# Altium PCB BreakBoard_bigger.PcbDoc
Units mm, origin at the board's own origin, x right, y up, seen from the top; angles counter-clockwise.
Board outline 137.03 x 112.9 mm, 2 copper layers (Top Layer, Bottom Layer), stack 1.331 mm thick; 41 components, 30 nets, 132 pads, 35 vias.
Unrouted connection lines stored in the file: 1.
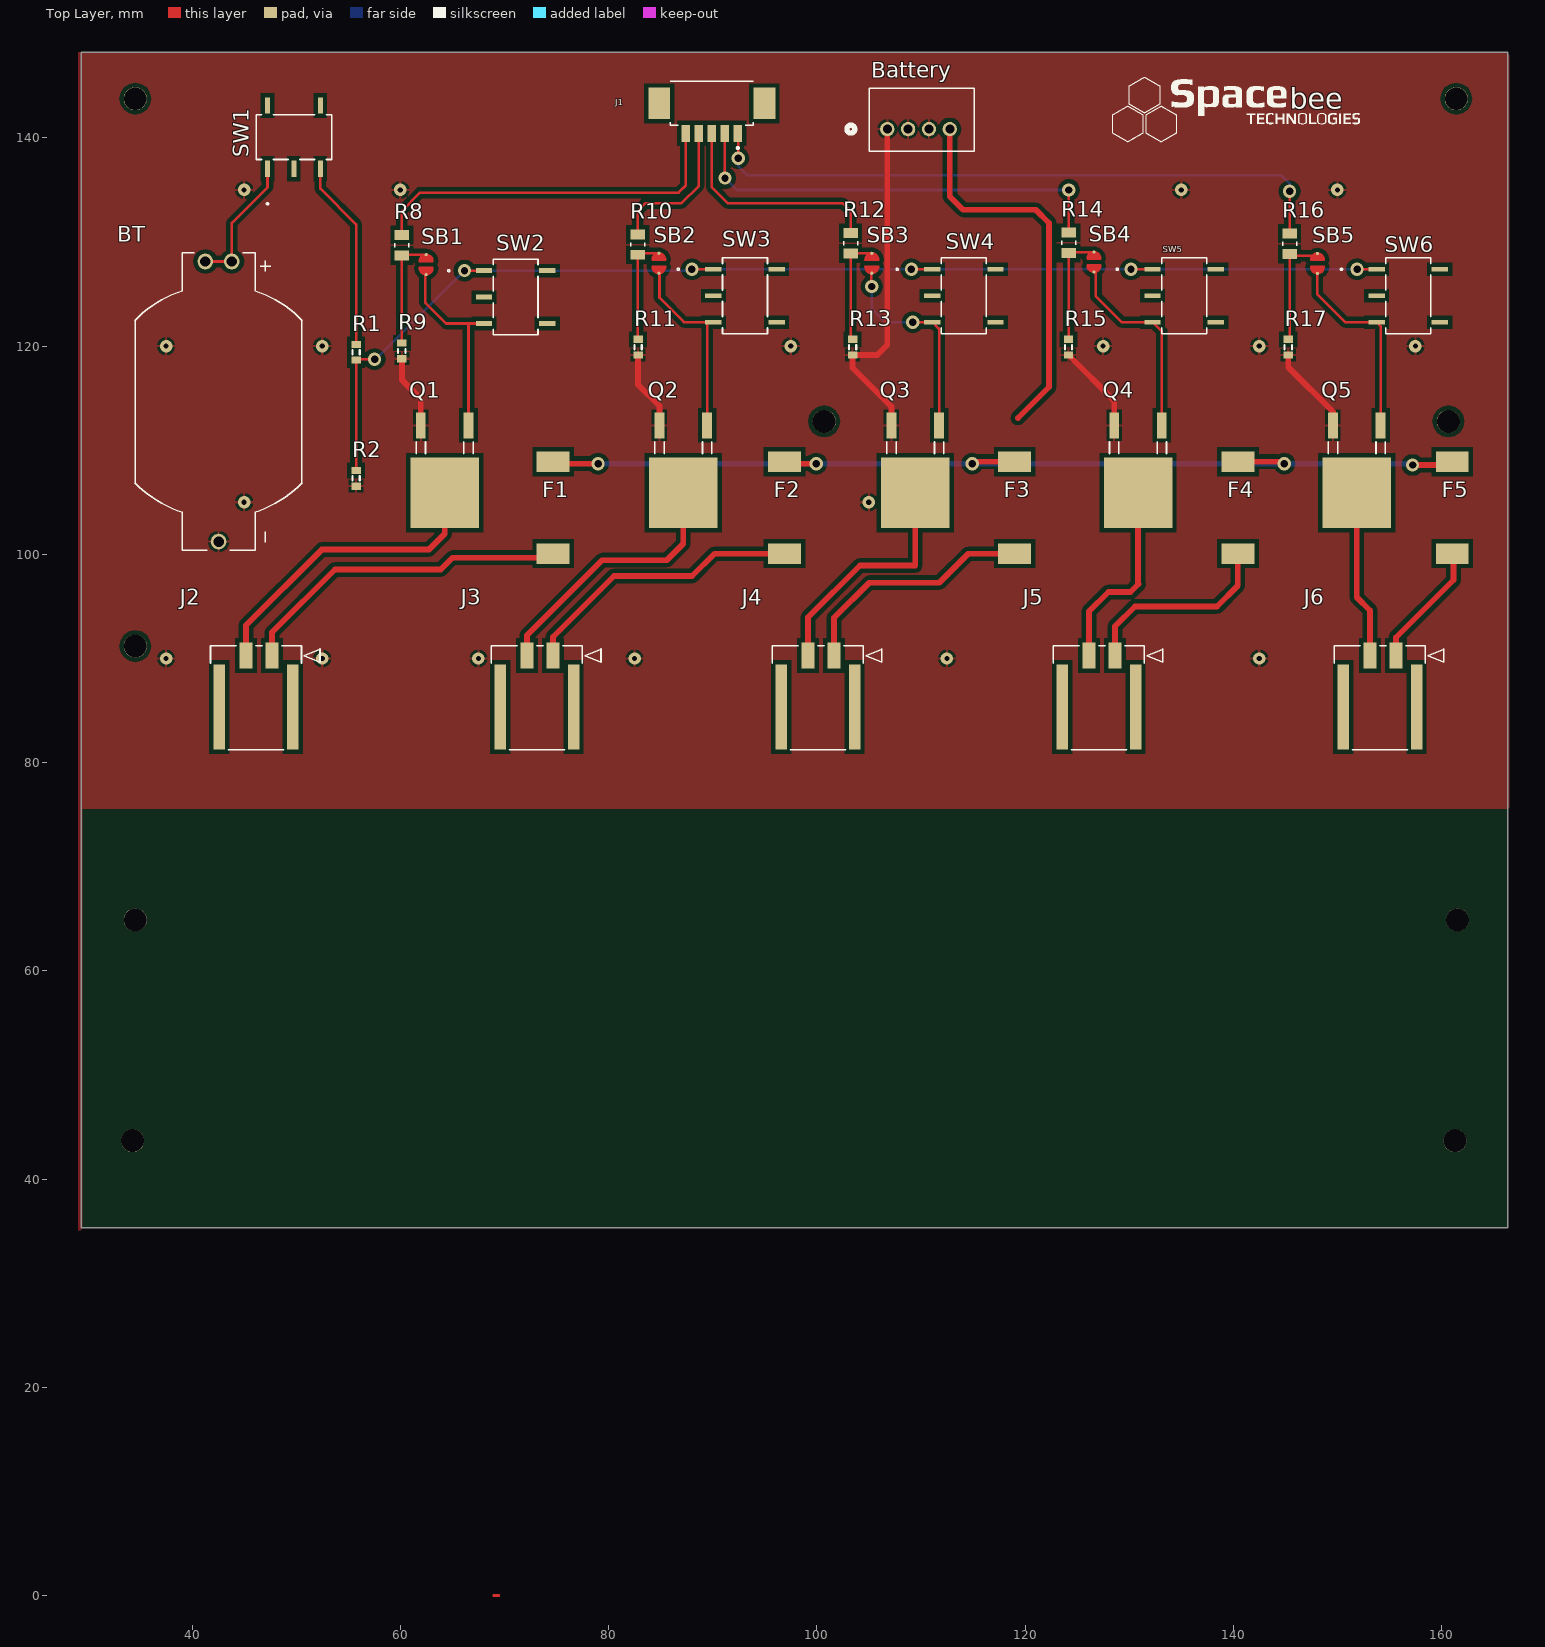
[diagram p0: Top Layer view]
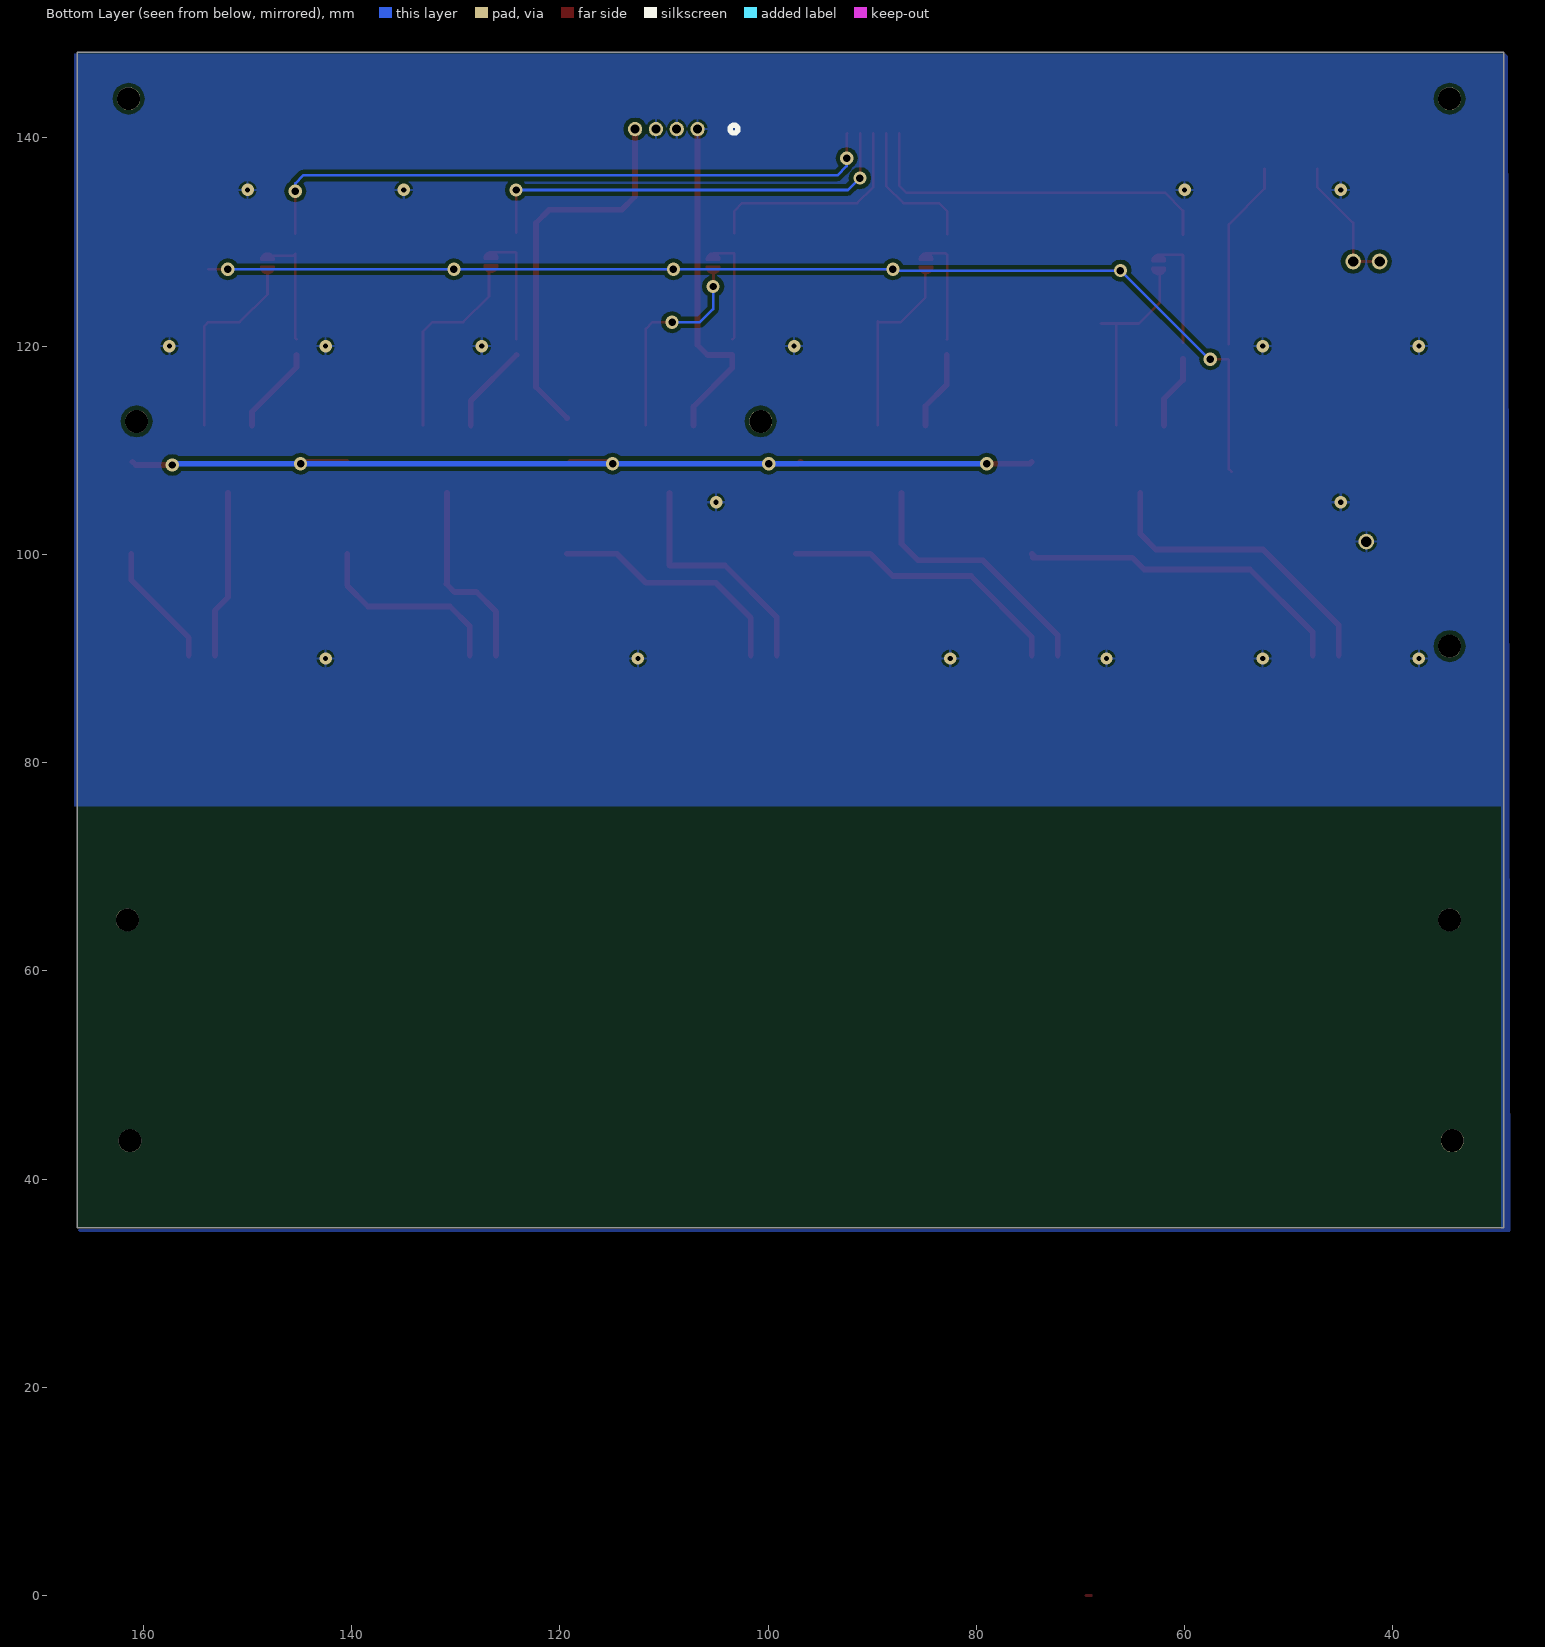
[diagram p1: Bottom Layer view, seen from below]

## Layer stack, top to bottom
Top Solder: solder mask 0.0102, Solder Resist, Dk 3.5
Top Layer: signal copper 0.0356
Dielectric 1: dielectric 1.26, FR-4, Dk 4.8
Bottom Layer: signal copper 0.0356
Bottom Solder: solder mask 0.0102, Solder Resist, Dk 3.5

## Board outline
29.337,35.306 166.37,35.306 166.37,148.209 29.337,148.209

## Design rules (kind name [scope] priority, off if disabled: settings)
Clearance Clearance_1 [All] p1: gap=0.4 ignorepadtopadclearanceinfootprint=FALSE
Clearance "Schematic Clearance Constraint" [InNetClass('Undefined')] p2: gap=0.015 ignorepadtopadclearanceinfootprint=FALSE
Clearance Vias [OnLayer('Top Layer')] p3: gap=0.8 ignorepadtopadclearanceinfootprint=FALSE
PolygonConnect [All] p1: connectstyle=Relief reliefconductorwidth=0.254 reliefentries=4 polygonreliefangle="90 Angle" airgapwidth=0.254
RoutingVias [All] p1: holewidth=0.711 width=1.27 viastyle="Through Hole" minholewidth=0.711 minwidth=1.27 maxholewidth=0.711 maxwidth=1.27
SolderMaskExpansion [All] p1: expansion=0.102
Width "Schematic Width Constraint_10" [InNetClass('Undefined')] p1: maxlimit=0.559 minlimit=0.559 preferedwidth=0.559 minimp=50.000000 maximp=50.000000 favimp=50.000000
Width "Schematic Width Constraint" [InNetClass('Ids')] p2: maxlimit=0.559 minlimit=0.559 preferedwidth=0.559 minimp=50.000000 maximp=50.000000 favimp=50.000000
Width [All] p3: maxlimit=0.254 minlimit=0.254 preferedwidth=0.254
30 further rules are at their usual default settings.

## Classes and differential pairs
net class Ids: NetBattery_4
net class Undefined: GND NetF1_1 NetF2_1 NetF3_1 NetF4_1 NetF5_1 NetJ2_2 NetJ3_2 NetJ4_2 NetJ5_2 NetJ6_2

## Components (designator, comment, footprint, x,y, rotation, side; value= is the part's Value field where it differs from the comment)
Battery "Header 4" 292132-4_TYC 106.776,140.843 r0 top
BT "BU2032-1" BAT_BU2032-1 42.545,114.681 r270 top
F1 "015403.5DRT" FUSE_Bourns 76.226,99.076 r90 top
F2 "015403.5DRT" FUSE_Bourns 98.451,99.076 r90 top
F3 "015403.5DRT" FUSE_Bourns 120.549,99.076 r90 top
F4 "015403.5DRT" FUSE_Bourns 142.012,99.076 r90 top
F5 "015403.5DRT" FUSE_Bourns 162.586,99.076 r90 top
J1 "Micro" MOLEX_532610571 89.916,141.224 r180 top
J2 "DC/DC" CON_1054302102_MOL 47.687,90.274 r0 top
J3 "DC/DC" CON_1054302102_MOL 74.675,90.274 r0 top
J4 "DC/DC" CON_1054302102_MOL 101.662,90.274 r0 top
J5 "DC/DC" CON_1054302102_MOL 128.65,90.274 r0 top
J6 "DC/DC" CON_1054302102_MOL 155.637,90.274 r0 top
Q1 "IRL530" IRL530NSTRLPBF_INF 64.262,105.918 r180 top
Q2 "IRL530" IRL530NSTRLPBF_INF 87.178,105.918 r180 top
Q3 "IRL530" IRL530NSTRLPBF_INF 109.46,105.918 r180 top
Q4 "IRL530" IRL530NSTRLPBF_INF 130.852,105.918 r180 top
Q5 "IRL530" IRL530NSTRLPBF_INF 151.864,105.918 r180 top
R1 "Res3" J1-0603 55.753,119.416 r90 top value=1M
R2 "Res3" J1-0603 55.753,107.303 r90 top value=3.3M
R8 "Res3" RESC2012X60N 60.149,129.693 r90 top value=2.8M
R9 "Res3" J1-0603 60.149,119.545 r90 top value=3.3M
R10 "Res3" RESC2012X60N 82.804,129.756 r90 top value=2.8M
R11 "Res3" J1-0603 82.836,119.9 r90 top value=3.3M
R12 "Res3" RESC2012X60N 103.251,129.883 r90 top value=2.8M
R13 "Res3" J1-0603 103.441,119.9 r90 top value=3.3M
R14 "Res3" RESC2012X60N 124.206,129.921 r90 top value=2.8M
R15 "Res3" J1-0603 124.174,119.9 r90 top value=3.3M
R16 "Res3" RESC2012X60N 145.415,129.832 r90 top value=2.8M
R17 "Res3" J1-0603 145.288,119.9 r90 top value=3.3M
SB1 "SolderBridge" PCBComponent_1#1 58.364,136.403 r270 top
SB2 "SolderBridge" PCBComponent_1#2 80.716,136.53 r270 top
SB3 "SolderBridge" PCBComponent_1#3 101.163,136.53 r270 top
SB4 "SolderBridge" PCBComponent_1#4 122.499,136.642 r270 top
SB5 "SolderBridge" PCBComponent_1#5 143.962,136.515 r270 top
SW1 "GT12MSCBE" SW5_GT12MSCBE_CNK 49.784,140.081 r90 top
SW2 "GT12MSCBE" SW5_GT12MSCBE_CNK 71.069,124.714 r0 top
SW3 "GT12MSCBE" SW5_GT12MSCBE_CNK 93.107,124.841 r0 top
SW4 "GT12MSCBE" SW5_GT12MSCBE_CNK 114.128,124.841 r0 top
SW5 "GT12MSCBE" SW5_GT12MSCBE_CNK 135.277,124.841 r0 top
SW6 "GT12MSCBE" SW5_GT12MSCBE_CNK 156.807,124.841 r0 top

## Footprints (in the part's own frame and the unit in brackets; to place one, negate y for a bottom-side part, rotate by r counter-clockwise, add the part's x,y. Pads: shape width x height; smd on the part's side, far side on the other; paste and mask are expansions set on the pad)
292132-4_TYC [mil]
  round 54 hole 34 mask+0: 1(0,0) 2(78.74,0) 3(157.48,0) 4(236.22,0)
  silkscreen extent -153,-83 328,155, body extent -65,-85 321,143, height 268
BAT_BU2032-1 [mm]
  round 1.508 hole 1: NEG(13.45,0) S1+(-13.45,1.27) S2+(-13.45,-1.27)
  silkscreen extent -14.3,-8.06 14.3,8.06, body extent -14.43,-10 14.17,10, height 5.3
CON_1054302102_MOL [mm]
  rect 1.24x2.5 smd paste+0 mask+0.076: 1(0,0) 2(-2.5,0)
  rect 1.1x8.2 smd paste+0 mask+0.076: 3(1.97,-4.93) 4(-5.07,-4.93)
  silkscreen extent -5.92,-9.03 4.6,0.95, body extent -5.89,-10.12 2.85,1.31, height 6.99
FUSE_Bourns [mm]
  rect 1.96x3.15 smd: 1(1,1.55) 2(9.825,1.55)
  body extent 0.81,0.43 9.99,2.83, height 2.5
IRL530NSTRLPBF_INF [mil]
  rect 37x98 smd paste+0 mask+0: 1(-90.16,-254.84) 3(90.16,-254.84)
  rect 259x268 smd paste+0 mask+0: 2(0,0)
  silkscreen extent -108,-192 108,-147, body extent -129,-196 129,120, height 94
J1-0603 [mm] "Chip Resistor, Body 1.6x0.8mm, IPC High Density"
  rect 0.7x0.9 smd: 1(-0.75,0) 2(0.75,0)
  silkscreen extent -0.2,-0.35 0.2,0.35, body extent -0.85,-0.48 0.85,0.48, height 0.9
MOLEX_532610571 [mm]
  rect 0.8x1.6 smd: 1(-2.5,0.8) 2(-1.25,0.8) 3(0,0.8) 4(1.25,0.8) 5(2.5,0.8)
  rect 2.1x3 smd: S1(-5.05,-2.1) S2(5.05,-2.1)
  silkscreen extent -4,-4.2 4,2.3, body extent -5.69,-4.25 5.72,0.95, height 3.4
PCBComponent_1#1 [mm]
  round 0.3 smd: 0(9.53,4.12) 1(7.61,4.12)
  Top Layer lines w0.254: 8.96,4.39 9.23,4.39 ; 8.9,3.52 ccw(c8.9,4.12) 9.491,4.015 ; 8.9,3.52 ccw(c8.9,4.12) 9.491,4.015 ; 8.9,3.52 8.9,3.52 ; 8.9,3.52 8.9,3.52 ; 8.9,3.52 8.9,3.52 ; 8.9,3.52 8.9,3.52 ; 8.9,3.52 8.9,3.52 ; 8.9,3.52 8.9,3.52 ; 8.9,3.52 8.9,3.52 ; 8.9,3.52 8.9,3.52 ; 8.9,3.52 8.9,3.52 ; 8.9,3.52 8.9,3.52 ; 8.9,3.52 8.9,3.52 ; 8.9,3.52 8.9,3.52 ; 8.9,3.52 8.9,3.52 ; 8.9,3.52 8.9,3.52 ; 8.9,3.52 8.9,3.52 ; 8.9,3.52 8.9,3.52 ; 8.9,3.52 8.9,3.52 ; 8.9,3.52 8.9,3.52 ; 8.9,3.52 8.9,3.52 ; 8.9,3.52 8.9,3.52 ; 8.9,3.52 8.9,3.52 ; 8.9,3.52 8.9,3.52 ; 8.9,3.52 8.9,3.52 ; 8.9,3.52 8.9,3.52 ; 8.9,3.52 8.9,3.52 ; 8.9,3.52 8.9,3.52 ; 8.9,3.52 8.9,3.52 ; 8.9,3.52 8.9,3.52 ; 8.9,3.52 8.9,3.52 ; 8.9,3.52 8.9,3.52 ; 8.9,3.52 8.9,3.52 ; 8.9,3.52 8.9,3.52 ; 8.9,3.52 8.9,3.52 ; 8.9,3.52 8.9,3.52 ; 8.9,3.52 8.9,3.52 ; 8.9,3.52 8.9,3.52 ; 8.9,3.52 8.9,3.52 ; 8.9,3.52 8.9,3.52 ; 8.9,3.52 8.9,3.52 ; 8.9,3.52 8.9,3.52 ; 8.9,3.52 8.9,3.52 ; 8.9,3.52 8.9,3.52 ; 8.9,3.52 8.9,3.52 ; 8.9,3.52 8.9,3.89 ; 8.9,3.52 8.9,3.52 ; 8.9,3.52 8.9,3.89 ; 8.9,3.52 8.9,3.52 ; 8.9,3.52 8.9,3.52 ; 8.9,3.52 8.9,3.52 ; 8.9,3.52 8.9,3.52 ; 8.9,3.52 8.9,3.52 ; 8.9,3.52 8.9,3.52 ; 8.9,3.52 8.9,3.52 ; 8.9,3.52 8.9,3.52 ; 8.23,3.52 cw(c8.23,4.12) 7.679,3.883 ; 8.23,3.52 cw(c8.23,4.12) 7.679,3.883 ; 8.23,3.52 8.23,3.993 8.23,4.72 ; 7.679,3.883 cw(c8.23,4.12) 7.644,3.993 ; 7.679,3.883 cw(c8.23,4.12) 7.644,3.993 ; 8.9,3.89 8.9,3.91 ; 8.9,3.89 8.9,3.91 ; 8.9,3.89 8.995,3.795 9.1,3.69 9.215,3.805 9.32,3.91 ; 9.32,3.91 9.32,4.015 9.32,4.12 ; 9.32,3.91 9.267,3.963 9.215,4.015 9.11,4.12 9.035,4.195 ; 9.32,3.91 9.11,3.91 8.92,3.91 9.015,4.005 9.02,4.01 9.02,4.12 9.02,4.18 9.035,4.195 ; 8.9,3.91 8.9,4.12 ; 8.9,3.91 8.9,4.12 ; 7.83,3.993 7.83,3.92 7.908,3.842 8.06,3.69 8.06,3.993 8.06,4.55 8.06,4.59 7.83,4.36 ; 7.83,3.993 7.83,4.12 ; 7.83,3.993 7.83,4.12 ; 7.644,3.993 cw(c8.23,4.12) 7.63,4.122 ; 7.644,3.993 cw(c8.23,4.12) 7.63,4.122 ; 9.491,4.015 ccw(c8.9,4.12) 9.5,4.12 ; 9.491,4.015 ccw(c8.9,4.12) 9.5,4.12 ; 9.5,4.12 ccw(c8.9,4.12) 9.479,4.279 ; 9.5,4.12 ccw(c8.9,4.12) 9.479,4.279 ; 9.32,4.12 9.32,4.12 ; 9.32,4.12 9.32,4.12 ; 9.32,4.12 9.32,4.32 ; 9.32,4.12 9.32,4.32 ; 8.9,4.12 8.9,4.33 ; 8.9,4.12 8.9,4.33 ; 7.83,4.12 7.83,4.321 ; 7.83,4.12 7.83,4.321 ; 7.63,4.122 cw(c8.23,4.12) 8.23,4.72 ; 7.63,4.122 cw(c8.23,4.12) 8.23,4.72 ; 9.035,4.195 9.23,4.39 ; 9.035,4.195 9.035,4.195 ; 9.035,4.195 8.9,4.33 ; 9.479,4.279 ccw(c8.9,4.12) 9.416,4.426 ; 9.479,4.279 ccw(c8.9,4.12) 9.416,4.426 ; 9.32,4.32 9.23,4.23 9.23,4.24 9.23,4.39 ; 7.83,4.321 7.83,4.36 ; 7.83,4.321 7.83,4.36 ; 8.9,4.33 8.9,4.72 ; 8.9,4.33 8.9,4.72 ; 8.9,4.33 8.9,4.72 ; 8.9,4.33 8.9,4.72 ; 8.9,4.33 8.9,4.72 ; 8.9,4.33 8.9,4.72 ; 9.23,4.39 8.9,4.72 ; 9.23,4.39 8.9,4.72 ; 9.416,4.426 ccw(c8.9,4.12) 8.9,4.72 ; 9.416,4.426 ccw(c8.9,4.12) 8.9,4.72 ; 8.9,4.72 8.9,4.72 ; 8.9,4.72 8.9,4.72 ; 8.9,4.72 8.9,4.72 ; 8.9,4.72 8.9,4.72 ; 8.9,4.72 8.9,4.72 ; 8.9,4.72 8.9,4.72 ; 8.9,4.72 8.9,4.72 ; 8.9,4.72 8.9,4.72
PCBComponent_1#2 [mm]
  round 0.3 smd: 0(9.53,4.12) 1(7.61,4.12)
  Top Layer lines w0.254: 8.96,4.39 9.02,4.39 9.035,4.39 9.23,4.39 ; 8.9,3.52 ccw(c8.9,4.12) 9.329,3.701 ; 8.9,3.52 ccw(c8.9,4.12) 9.329,3.701 ; 8.9,3.52 8.9,3.52 ; 8.9,3.52 8.9,3.52 ; 8.9,3.52 8.9,3.52 ; 8.9,3.52 8.9,3.52 ; 8.9,3.52 8.9,3.52 ; 8.9,3.52 8.9,3.52 ; 8.9,3.52 8.9,3.52 ; 8.9,3.52 8.9,3.52 ; 8.9,3.52 8.9,3.52 ; 8.9,3.52 8.9,3.52 ; 8.9,3.52 8.9,3.52 ; 8.9,3.52 8.9,3.52 ; 8.9,3.52 8.9,3.52 ; 8.9,3.52 8.9,3.52 ; 8.9,3.52 8.9,3.52 ; 8.9,3.52 8.9,3.52 ; 8.9,3.52 8.9,3.52 ; 8.9,3.52 8.9,3.52 ; 8.9,3.52 8.9,3.52 ; 8.9,3.52 8.9,3.52 ; 8.9,3.52 8.9,3.52 ; 8.9,3.52 8.9,3.52 ; 8.9,3.52 8.9,3.52 ; 8.9,3.52 8.9,3.52 ; 8.9,3.52 8.9,3.52 ; 8.9,3.52 8.9,3.52 ; 8.9,3.52 8.9,3.52 ; 8.9,3.52 8.9,3.52 ; 8.9,3.52 8.9,3.52 ; 8.9,3.52 8.9,3.52 ; 8.9,3.52 8.9,3.52 ; 8.9,3.52 8.9,3.52 ; 8.9,3.52 8.9,3.52 ; 8.9,3.52 8.9,3.52 ; 8.9,3.52 8.9,3.52 ; 8.9,3.52 8.9,3.52 ; 8.9,3.52 8.9,3.52 ; 8.9,3.52 8.9,3.52 ; 8.9,3.52 8.9,3.52 ; 8.9,3.52 8.9,3.52 ; 8.9,3.52 8.9,3.52 ; 8.9,3.52 8.9,3.89 ; 8.9,3.52 8.9,3.52 ; 8.9,3.52 8.9,3.89 ; 8.9,3.52 8.9,3.52 ; 8.9,3.52 8.9,3.52 ; 8.9,3.52 8.9,3.52 ; 8.9,3.52 8.9,3.52 ; 8.9,3.52 8.9,3.52 ; 8.9,3.52 8.9,3.52 ; 8.9,3.52 8.9,3.52 ; 8.9,3.52 8.9,3.52 ; 8.9,3.52 8.9,3.52 ; 8.9,3.52 8.9,3.52 ; 8.23,3.52 cw(c8.23,4.12) 8.026,3.556 ; 8.23,3.52 cw(c8.23,4.12) 8.026,3.556 ; 8.23,3.52 8.23,4.72 ; 8.026,3.556 cw(c8.23,4.12) 7.83,3.673 ; 8.026,3.556 cw(c8.23,4.12) 7.83,3.673 ; 7.83,3.673 cw(c8.23,4.12) 8.23,4.72 ; 7.83,3.673 cw(c8.23,4.12) 8.23,4.72 ; 9.329,3.701 ccw(c8.9,4.12) 9.5,4.1 ; 8.9,3.89 9.089,3.701 9.1,3.69 9.111,3.701 9.32,3.91 ; 8.9,3.89 8.9,4.18 ; 8.9,3.89 8.9,4.18 ; 9.32,3.91 8.92,3.91 9.02,4.01 9.02,4.18 9.035,4.195 ; 9.32,3.91 9.13,4.1 9.05,4.18 9.035,4.195 ; 9.32,3.91 9.32,4.1 ; 7.83,3.92 8.051,3.699 8.06,3.69 8.06,3.749 8.06,3.92 8.06,4.59 7.83,4.36 ; 7.83,3.92 7.83,4.12 ; 7.83,3.92 7.83,4.12 ; 9.5,4.1 ccw(c8.9,4.12) 9.497,4.18 ; 9.5,4.1 ccw(c8.9,4.12) 9.497,4.18 ; 9.32,4.1 9.32,4.12 ; 9.32,4.1 9.32,4.12 ; 9.32,4.12 9.32,4.18 ; 9.32,4.12 9.32,4.18 ; 7.83,4.12 7.83,4.36 ; 7.83,4.12 7.83,4.36 ; 9.497,4.18 ccw(c8.9,4.12) 9.353,4.513 ; 9.497,4.18 ccw(c8.9,4.12) 9.353,4.513 ; 9.32,4.18 9.32,4.32 ; 9.32,4.18 9.32,4.32 ; 8.9,4.18 8.9,4.195 ; 8.9,4.18 8.9,4.195 ; 9.035,4.195 8.9,4.33 ; 9.035,4.195 9.23,4.39 ; 8.9,4.195 8.9,4.33 ; 8.9,4.195 8.9,4.33 ; 9.32,4.32 9.23,4.23 9.23,4.39 ; 8.9,4.33 8.9,4.72 ; 8.9,4.33 8.9,4.72 ; 8.9,4.33 8.9,4.72 ; 8.9,4.33 8.9,4.72 ; 8.9,4.33 8.9,4.72 ; 8.9,4.33 8.9,4.72 ; 9.23,4.39 8.9,4.72 ; 9.23,4.39 8.9,4.72 ; 9.353,4.513 ccw(c8.9,4.12) 8.9,4.72 ; 9.353,4.513 ccw(c8.9,4.12) 8.9,4.72 ; 8.9,4.72 8.9,4.72 ; 8.9,4.72 8.9,4.72 ; 8.9,4.72 8.9,4.72 ; 8.9,4.72 8.9,4.72 ; 8.9,4.72 8.9,4.72 ; 8.9,4.72 8.9,4.72 ; 8.9,4.72 8.9,4.72 ; 8.9,4.72 8.9,4.72
PCBComponent_1#3 [mm]
  round 0.3 smd: 0(9.53,4.12) 1(7.61,4.12)
  Top Layer lines w0.254: 8.96,4.39 9.23,4.39 ; 8.23,3.52 cw(c8.23,4.12) 8.037,3.552 ; 8.23,3.52 cw(c8.23,4.12) 8.037,3.552 ; 8.23,3.52 8.23,4.72 ; 8.23,3.52 8.23,4.72 ; 8.037,3.552 cw(c8.23,4.12) 7.83,3.673 ; 8.037,3.552 cw(c8.23,4.12) 7.83,3.673 ; 7.83,3.673 cw(c8.23,4.12) 8.23,4.72 ; 7.83,3.673 cw(c8.23,4.12) 8.23,4.72 ; 8.9,3.89 8.9,3.52 ccw(c8.9,4.12) 9.499,4.081 ccw(c8.9,4.12) 9.5,4.12 ; 8.9,3.89 9.1,3.69 9.32,3.91 ; 8.9,3.89 8.9,4.081 ; 8.9,3.89 8.9,4.081 ; 9.32,3.91 9.149,4.081 9.035,4.195 ; 9.32,3.91 9.32,4.081 ; 9.32,3.91 9.149,3.91 8.92,3.91 9.02,4.01 9.02,4.081 9.02,4.18 9.035,4.195 ; 7.83,3.92 8.06,3.69 8.06,4.12 8.06,4.59 7.83,4.36 ; 7.83,3.92 7.83,4.12 ; 7.83,3.92 7.83,4.12 ; 9.32,4.081 9.32,4.12 ; 9.32,4.081 9.32,4.12 ; 8.9,4.081 8.9,4.33 ; 8.9,4.081 8.9,4.33 ; 9.5,4.12 ccw(c8.9,4.12) 9.443,4.375 ; 9.5,4.12 ccw(c8.9,4.12) 9.443,4.375 ; 9.32,4.12 9.32,4.252 ; 9.32,4.12 9.32,4.252 ; 7.83,4.12 7.83,4.36 ; 7.83,4.12 7.83,4.36 ; 9.035,4.195 8.9,4.33 ; 9.035,4.195 9.23,4.39 ; 9.32,4.252 9.32,4.32 9.23,4.23 9.23,4.39 ; 8.9,4.33 8.9,4.72 ; 8.9,4.33 8.9,4.72 ; 8.9,4.33 8.9,4.72 ; 9.443,4.375 ccw(c8.9,4.12) 8.9,4.72 ; 9.443,4.375 ccw(c8.9,4.12) 8.9,4.72 ; 9.23,4.39 8.9,4.72
PCBComponent_1#4 [mm]
  round 0.3 smd: 0(9.53,4.12) 1(7.61,4.12)
  Top Layer lines w0.254: 8.96,4.39 9.23,4.39 ; 8.23,3.52 cw(c8.23,4.12) 7.83,3.673 ; 8.23,3.52 cw(c8.23,4.12) 7.83,3.673 ; 8.23,3.52 8.23,3.52 ; 8.23,3.52 8.23,3.52 ; 8.23,3.52 8.23,3.52 ; 8.23,3.52 8.23,3.52 ; 8.23,3.52 8.23,3.52 ; 8.23,3.52 8.23,3.52 ; 8.23,3.52 8.23,3.52 ; 8.23,3.52 8.23,3.52 ; 8.23,3.52 8.23,3.52 ; 8.23,3.52 8.23,3.52 ; 8.23,3.52 8.23,3.52 ; 8.23,3.52 8.23,3.52 ; 8.23,3.52 8.23,3.52 ; 8.23,3.52 8.23,3.52 ; 8.23,3.52 8.23,3.52 ; 8.23,3.52 8.23,3.52 ; 8.23,3.52 8.23,3.52 ; 8.23,3.52 8.23,3.52 ; 8.23,3.52 8.23,3.52 ; 8.23,3.52 8.23,3.52 ; 8.23,3.52 8.23,3.52 ; 8.23,3.52 8.23,3.52 ; 8.23,3.52 8.23,3.52 ; 8.23,3.52 8.23,3.52 ; 8.23,3.52 8.23,3.52 ; 8.23,3.52 8.23,3.52 ; 8.23,3.52 8.23,3.52 ; 8.23,3.52 8.23,3.52 ; 8.23,3.52 8.23,3.52 ; 8.23,3.52 8.23,3.52 ; 8.23,3.52 8.23,3.52 ; 8.23,3.52 8.23,3.52 ; 8.23,3.52 8.23,3.52 ; 8.23,3.52 8.23,3.52 ; 8.23,3.52 8.23,3.52 ; 8.23,3.52 8.23,3.52 ; 8.23,3.52 8.23,3.52 ; 8.23,3.52 8.23,3.52 ; 8.23,3.52 8.23,3.52 ; 8.23,3.52 8.23,3.52 ; 8.23,3.52 8.23,3.52 ; 8.23,3.52 8.23,3.52 ; 8.23,3.52 8.23,3.52 ; 8.23,3.52 8.23,3.52 ; 8.23,3.52 8.23,3.52 ; 8.23,3.52 8.23,3.52 ; 8.23,3.52 8.23,3.52 ; 8.23,3.52 8.23,3.52 ; 8.23,3.52 8.23,3.52 ; 8.23,3.52 8.23,3.52 ; 8.23,3.52 8.23,4.12 ; 8.23,3.52 8.23,3.52 ; 8.23,3.52 8.23,3.52 ; 8.23,3.52 8.23,4.12 ; 8.23,3.52 8.23,3.52 ; 8.23,3.52 8.23,3.52 ; 7.83,3.673 cw(c8.23,4.12) 7.729,3.789 ; 7.83,3.673 cw(c8.23,4.12) 7.729,3.789 ; 7.729,3.789 cw(c8.23,4.12) 7.685,3.87 ; 7.729,3.789 cw(c8.23,4.12) 7.685,3.87 ; 7.685,3.87 cw(c8.23,4.12) 8.23,4.72 ; 7.685,3.87 cw(c8.23,4.12) 8.23,4.72 ; 8.9,3.89 8.9,3.52 ccw(c8.9,4.12) 9.486,3.993 ; 8.9,3.89 9.1,3.69 9.32,3.91 ; 8.9,3.89 8.9,4.33 ; 8.9,3.89 8.9,4.33 ; 9.32,3.91 8.92,3.91 9.02,4.01 9.02,4.18 9.035,4.195 ; 9.32,3.91 9.237,3.993 9.035,4.195 ; 9.32,3.91 9.32,3.993 ; 7.83,3.92 7.83,4.097 ; 7.83,3.92 7.83,4.097 ; 7.83,3.92 7.845,3.905 8.06,3.69 8.06,4.097 8.06,4.12 8.06,4.455 8.06,4.59 7.83,4.36 ; 9.486,3.993 ccw(c8.9,4.12) 9.469,4.31 ; 9.486,3.993 ccw(c8.9,4.12) 9.469,4.31 ; 9.32,3.993 9.32,4.12 ; 9.32,3.993 9.32,4.12 ; 7.83,4.097 7.83,4.12 ; 7.83,4.097 7.83,4.12 ; 9.32,4.12 9.32,4.31 ; 9.32,4.12 9.32,4.31 ; 8.23,4.12 8.23,4.72 ; 8.23,4.12 8.23,4.72 ; 7.83,4.12 7.83,4.36 ; 7.83,4.12 7.83,4.36 ; 9.035,4.195 8.9,4.33 ; 9.035,4.195 9.23,4.39 ; 9.469,4.31 ccw(c8.9,4.12) 9.326,4.543 ; 9.469,4.31 ccw(c8.9,4.12) 9.326,4.543 ; 9.32,4.31 9.32,4.32 ; 9.32,4.31 9.32,4.32 ; 9.32,4.32 9.31,4.31 9.23,4.23 9.23,4.31 9.23,4.39 ; 8.9,4.33 8.9,4.72 ; 8.9,4.33 8.9,4.72 ; 8.9,4.33 8.9,4.72 ; 9.23,4.39 8.9,4.72 ; 9.23,4.39 9.23,4.39 ; 9.326,4.543 ccw(c8.9,4.12) 9.23,4.621 ; 9.326,4.543 ccw(c8.9,4.12) 9.23,4.621 ; 9.23,4.621 ccw(c8.9,4.12) 8.9,4.72 ; 9.23,4.621 ccw(c8.9,4.12) 8.9,4.72 ; 8.23,4.72 8.23,4.72 ; 8.23,4.72 8.23,4.72
PCBComponent_1#5 [mm]
  round 0.3 smd: 0(9.53,4.12) 1(7.61,4.12)
  Top Layer lines w0.254: 8.96,4.39 9.23,4.39 ; 8.9,3.52 ccw(c8.9,4.12) 9.5,4.12 ; 8.9,3.52 ccw(c8.9,4.12) 9.5,4.12 ; 8.9,3.52 8.9,3.52 ; 8.9,3.52 8.9,3.52 ; 8.9,3.52 8.9,3.52 ; 8.9,3.52 8.9,3.52 ; 8.9,3.52 8.9,3.52 ; 8.9,3.52 8.9,3.52 ; 8.9,3.52 8.9,3.52 ; 8.9,3.52 8.9,3.52 ; 8.9,3.52 8.9,3.52 ; 8.9,3.52 8.9,3.52 ; 8.9,3.52 8.9,3.52 ; 8.9,3.52 8.9,3.52 ; 8.9,3.52 8.9,3.52 ; 8.9,3.52 8.9,3.52 ; 8.9,3.52 8.9,3.52 ; 8.9,3.52 8.9,3.52 ; 8.9,3.52 8.9,3.52 ; 8.9,3.52 8.9,3.52 ; 8.9,3.52 8.9,3.52 ; 8.9,3.52 8.9,3.52 ; 8.9,3.52 8.9,3.52 ; 8.9,3.52 8.9,3.52 ; 8.9,3.52 8.9,3.52 ; 8.9,3.52 8.9,3.52 ; 8.9,3.52 8.9,3.52 ; 8.9,3.52 8.9,3.52 ; 8.9,3.52 8.9,3.52 ; 8.9,3.52 8.9,3.52 ; 8.9,3.52 8.9,3.52 ; 8.9,3.52 8.9,3.52 ; 8.9,3.52 8.9,3.52 ; 8.9,3.52 8.9,3.52 ; 8.9,3.52 8.9,3.52 ; 8.9,3.52 8.9,3.52 ; 8.9,3.52 8.9,3.52 ; 8.9,3.52 8.9,3.52 ; 8.9,3.52 8.9,3.52 ; 8.9,3.52 8.9,3.52 ; 8.9,3.52 8.9,3.52 ; 8.9,3.52 8.9,3.52 ; 8.9,3.52 8.9,3.52 ; 8.9,3.52 8.9,3.89 ; 8.9,3.52 8.9,3.52 ; 8.9,3.52 8.9,3.52 ; 8.9,3.52 8.9,3.89 ; 8.9,3.52 8.9,3.52 ; 8.9,3.52 8.9,3.52 ; 8.9,3.52 8.9,3.52 ; 8.9,3.52 8.9,3.52 ; 8.9,3.52 8.9,3.52 ; 8.9,3.52 8.9,3.52 ; 8.9,3.52 8.9,3.52 ; 8.23,3.52 cw(c8.23,4.12) 7.83,3.673 ; 8.23,3.52 cw(c8.23,4.12) 7.83,3.673 ; 8.23,3.52 8.23,4.72 ccw(c8.23,4.12) 7.668,3.909 ; 7.83,3.673 cw(c8.23,4.12) 7.718,3.808 ; 7.83,3.673 cw(c8.23,4.12) 7.718,3.808 ; 7.718,3.808 cw(c8.23,4.12) 7.668,3.909 ; 7.718,3.808 cw(c8.23,4.12) 7.668,3.909 ; 8.9,3.89 9.1,3.69 9.32,3.91 ; 8.9,3.89 8.9,4.33 ; 8.9,3.89 8.9,4.33 ; 9.32,3.91 8.92,3.91 9.02,4.01 9.02,4.12 9.02,4.18 9.035,4.195 ; 9.32,3.91 9.215,4.015 9.11,4.12 9.035,4.195 ; 9.32,3.91 9.32,4.12 ; 9.32,3.91 9.32,4.12 ; 7.83,4.071 7.83,3.92 8.06,3.69 8.06,3.92 8.06,4.071 8.06,4.59 7.83,4.36 ; 7.83,4.071 7.83,4.12 ; 7.83,4.071 7.83,4.12 ; 9.5,4.12 ccw(c8.9,4.12) 9.353,4.513 ; 9.5,4.12 ccw(c8.9,4.12) 9.353,4.513 ; 9.32,4.12 9.32,4.32 ; 9.32,4.12 9.32,4.32 ; 7.83,4.12 7.83,4.36 ; 7.83,4.12 7.83,4.36 ; 9.035,4.195 8.9,4.33 ; 9.035,4.195 9.23,4.39 ; 9.32,4.32 9.31,4.31 9.23,4.23 9.23,4.39 ; 8.9,4.33 8.9,4.72 ; 8.9,4.33 8.9,4.72 ; 8.9,4.33 8.9,4.72 ; 8.9,4.33 8.9,4.72 ; 8.9,4.33 8.9,4.72 ; 8.9,4.33 8.9,4.72 ; 9.23,4.39 8.9,4.72 ; 9.23,4.39 8.9,4.72 ; 9.353,4.513 ccw(c8.9,4.12) 8.9,4.72 ; 9.353,4.513 ccw(c8.9,4.12) 8.9,4.72 ; 8.9,4.72 8.9,4.72 ; 8.9,4.72 8.9,4.72 ; 8.9,4.72 8.9,4.72 ; 8.9,4.72 8.9,4.72 ; 8.9,4.72 8.9,4.72 ; 8.9,4.72 8.9,4.72 ; 8.9,4.72 8.9,4.72 ; 8.9,4.72 8.9,4.72
RESC2012X60N [mm]
  rect 0.96x1.38 smd: 1(-0.978,0) 2(0.978,0)
  silkscreen extent -0.18,-0.68 0.18,0.68, body extent -1.02,-0.83 1.02,0.83, height 0.51
SW5_GT12MSCBE_CNK [mil]
  rect 62x18 smd paste+0 mask+0: 1(-119.5,100) 2(-119.5,0) 3(-119.5,-100) 4(119.5,-100) 6(119.5,100)
  silkscreen extent -256,-143 85,143, body extent -139,-138 139,138, height 443

## Part data
Battery: "Header, 4-Pin", LatestRevisionDate=17-Jul-2002, LatestRevisionNote="Re-released for DXP Platform.", Publisher="Altium Limited"
BT: "HOLDER CR2032 W/ PC PINS", Package="Non-Standard MPD", DigiKey-Purchase-URL=https://snapeda.com/shop?store=DigiKey&id=4219651, MF=MPD, MP=BU2032-1, SnapEDA_Link=https://www.snapeda.com/parts/BU2032-1/Memory%20Protection%20Devices/view-part/4219651/?ref=snap
F1 F2 F3 F4 F5: "No Description Available", Mfr_Name="Littelfuse Inc", Copyright="Copyright (C) 2022 Ultra Librarian. All rights reserved.", Manufacturer_Part_Number=015403.5DRT, RefDes=RefDes, Type=DEV
J1: library part HTSW-105-07-L-S, "No Description Available", Mfr_Name="Samtec Inc", Copyright="Copyright (C) 2022 Ultra Librarian. All rights reserved.", Digi-Key_Part_Number_1=SAM11370-ND, Manufacturer_Part_Number=HTSW-105-07-L-S, RefDes=RefDes, Type=DEV
J2 J3 J4 J5 J6: library part TSW-102-05-T-S, "No Description Available", Mfr_Name="Samtec Inc", Copyright="Copyright (C) 2022 Ultra Librarian. All rights reserved.", Digi-Key_Part_Number_1=SAM1019-02-ND, Digi-Key_Part_Number_2=TSW-102-05-T-S-NDL, Digi-Key_Part_Number_3=612-TSW-102-05-T-S-ND, Manufacturer_Part_Number=TSW-102-05-T-S, RefDes=RefDes, Type=DEV
Q1 Q2 Q3 Q4 Q5: "N-Channel 100V 15A (Tc) 88W (Tc) Through Hole TO-220AB", Package="TO-220-3 Vishay / Siliconix", Availability=Unavailable, MF="Vishay / Siliconix", MP=IRL530, Price=None, SnapEDA_Link=https://www.snapeda.com/parts/IRL530/Vishay%20Siliconix/view-part/4705327/?ref=snap
R1 R2 R8 R9 R10 R11 R12 R13 R14 R15 R16 R17: "Resistor", LatestRevisionDate=29-May-2009, LatestRevisionNote="IPC-7351 Footprint Added.", PackageDescription="Chip Resistor", PackageReference=J1-0603, Published=8-Jun-2000, Publisher="Altium Limited"
SB1 SB2 SB3 SB4 SB5: library part Component_1
SW1 SW2 SW3 SW4 SW5 SW6: "No Description Available", Mfr_Name=C&K, Copyright="Copyright (C) 2022 Ultra Librarian. All rights reserved.", Digi-Key_Part_Number_1=CKN9050TR-ND, Digi-Key_Part_Number_2=CKN9050CT-ND, Digi-Key_Part_Number_3=CKN9050DKR-ND, Digi-Key_Part_Number_4=CKN9050TR-NDL, Manufacturer_Part_Number=GT12MSCBE, RefDes=RefDes, Type=DEV

## Free pads (board coordinates)
  round 2.2 hole 2.2 unplated: H1(34.544,143.764) H2(34.544,91.186) H3(100.711,112.776) H4(34.29,43.688) H4(34.544,64.897) H5(161.417,143.764) H6(160.655,112.776) H7(161.29,43.688) H7(161.544,64.897)

## Via types
v1: diameter 1.2, hole 0.5, Top Layer to Bottom Layer, 18 vias
v2: diameter 1.27, hole 0.711, Top Layer to Bottom Layer, 17 vias

## Nets (pads, with @x,y where several pads share a name; then routed paths per layer and width w, separated by ;. In a path a pad name is that pad's centre, name@x,y a point inside that pad or via, vN(x,y) a via of type N, cw(c..) or ccw(c..) an arc to the next point about the centre after c; other vN are vias at no path point)
GND: Battery.1 Battery.2 Battery.3 BT.NEG Q1.3 Q2.3 Q3.3 Q4.3 Q5.3 R2.1 R9.1 R11.1 R13.1 R15.1 R17.1 | length 64.6
  Top Layer w0.559: R9.1 60.149,116.762 61.972,114.939 Q1.3 ; R11.1 82.836,116.3 84.888,114.248 Q2.3 ; Battery.1 106.776,120.111 105.815,119.15 R13.1 103.441,117.919 107.17,114.191 Q3.3 ; R15.1 128.562,114.762 Q4.3 ; R17.1 145.288,117.983 149.574,113.697 Q5.3
  other v1: 37.5,90 52.5,90 67.5,90 82.5,90 112.5,90 142.5,90 45,105 105,105 37.5,120 52.5,120 97.5,120 127.5,120 142.5,120 157.5,120 45,135 60,135 135,135 150,135
NetBattery_4: Battery.4 F1.2 F2.2 F3.2 F4.2 F5.2 | length 135.4
  Top Layer w0.559: F1.2 74.865,108.712 v2(78.994,108.712) ; F2.2 97.09,108.712 v2(99.949,108.712) ; Battery.4 112.776,134.366 114.046,133.096 121.031,133.096 122.301,131.826 122.301,116.078 119.316,113.093 ; v2(114.935,108.712) 115.124,108.901 F3.2 ; F4.2 144.337,108.901 144.526,108.712 v2(144.907,108.712) ; v2(157.226,108.585) 160.72,108.585 F5.2
  Bottom Layer w0.559: v2(78.994,108.712) v2(99.949,108.712) v2(114.935,108.712) v2(144.907,108.712) 157.099,108.712 v2(157.226,108.585)
NetBT_S1+: BT.S1+ BT.S2+ SW1.1 | length 12.9
  Top Layer w0.254: BT.S2+ BT.S1+ 43.815,131.826 47.244,135.255 SW1.1
NetF1_1: F1.1 J2.1 | length 32.6
  Top Layer w0.559: J2.1 47.687,92.518 53.721,98.552 63.881,98.552 65.011,99.682 74.549,99.682 74.422,99.809 F1.1@74.676,100.063
NetF2_1: F2.1 J3.1 | length 27.7
  Top Layer w0.559: J3.1 74.675,92.074 80.518,97.917 88.024,97.917 90.17,100.063 F2.1@97.314,100.063
NetF3_1: F3.1 J4.1 | length 23.8
  Top Layer w0.559: J4.1 101.662,93.915 105.029,97.282 111.76,97.282 114.541,100.063 F3.1@119.316,100.063
NetF4_1: F4.1 J5.1 | length 19.3
  Top Layer w0.559: J5.1 128.65,93.09 130.556,94.996 138.43,94.996 140.43,96.996 F4.1@140.43,100.063
NetF5_1: F5.1 J6.1 | length 12.1
  Top Layer w0.559: J6.1 155.637,92.01 161.163,97.536 F5.1@161.163,100.063
NetJ1_1: J1.1 R16.2 | length 61.6
  Top Layer w0.254: J1.1 92.456,140.384 v2(92.456,138.049) ; R16.2 v2(145.415,134.874)
  Bottom Layer w0.254: v2(92.456,138.049) 92.456,137.287 93.345,136.398 144.653,136.398 145.415,135.636 v2(145.415,134.874)
NetJ1_2: J1.2 R14.2 | length 42.4
  Top Layer w0.254: J1.2 91.166,136.164 v2(91.186,136.144) v2@91.547,135.783 ; R14.2 v2(124.206,135.001)
  Bottom Layer w0.254: v2(91.186,136.144) 92.329,135.001 v2(124.206,135.001)
NetJ1_3: J1.3 R12.2 | length 21.6
  Top Layer w0.254: J1.3 89.916,135.255 91.44,133.731 102.489,133.731 103.251,132.969 R12.2
NetJ1_4: J1.4 R10.2 | length 14.1
  Top Layer w0.254: R10.2 82.804,132.969 83.566,133.731 86.995,133.731 88.666,135.402 J1.4
NetJ1_5: J1.5 R8.2 | length 35.6
  Top Layer w0.254: R8.2 60.149,132.995 61.901,134.747 86.741,134.747 87.416,135.422 J1.5
NetJ2_2: J2.2 Q1.2 | length 29.6
  Top Layer w0.559: J2.2 45.187,93.193 52.451,100.457 62.738,100.457 64.262,101.981 Q1.2
NetJ3_2: J3.2 Q2.2 | length 25.5
  Top Layer w0.559: J3.2 72.175,92.241 79.375,99.441 85.598,99.441 87.178,101.021 Q2.2
NetJ4_2: J4.2 Q3.2 | length 23
  Top Layer w0.559: J4.2 99.162,93.955 104.14,98.933 109.46,98.933 Q3.2
NetJ5_2: J5.2 Q4.2 | length 18.9
  Top Layer w0.559: J5.2 126.15,94.527 128.016,96.393 130.133,96.393 130.895,97.155 130.852,97.155 Q4.2
NetJ6_2: J6.2 Q5.2 | length 16.2
  Top Layer w0.559: Q5.2 151.864,95.885 153.137,94.612 J6.2
NetQ1_1: Q1.1 SB1.0 SW2.3 | length 19.2
  Top Layer w0.254: 62.379,127.083 62.379,126.912 62.379,124.184 64.389,122.174 66.421,122.174 ; Q1.1 66.552,122.043 66.421,122.174 ; SW2.3 66.421,122.174
NetQ2_1: Q2.1 SB2.0 SW3.3 | length 17.9
  Top Layer w0.254: SB2.0@84.896,127.033 84.896,124.654 87.249,122.301 SW3.3@89.469,122.301 ; Q2.1 SW3.3@89.469,122.301 ; SW3.3@89.469,122.362 SW3.3@89.469,122.301
NetQ3_1: Q3.1 SB3.0 SW4.3 | length 20.3
  Top Layer w0.254: 105.244,127.381 105.244,127.21 105.244,127.031 105.244,125.769 v2(105.283,125.73) ; v2(109.22,122.301) SW4.3 111.75,121.644 Q3.1
  Bottom Layer w0.254: v2(105.283,125.73) 105.283,123.571 106.553,122.301 v2(109.22,122.301)
NetQ4_1: Q4.1 SB4.0 SW5.3 | length 19.3
  Top Layer w0.254: 126.809,127.332 126.809,127.322 126.809,127.173 126.809,124.778 129.286,122.301 SW5.3 133.142,121.4 Q4.1
NetQ5_1: Q5.1 SB5.0 SW6.3 | length 19.1
  Top Layer w0.254: 148.082,127.195 148.082,127.015 SB5.0 148.082,124.968 150.749,122.301 SW6.3 154.154,121.919 Q5.1
NetR1_1: R1.1 R2.2 SW2.1 SW3.1 SW4.1 SW5.1 SW6.1 | length 120.4
  Top Layer w0.254: R2.2@55.499,107.95 55.753,108.204 R1.1 55.832,118.745 v2(57.531,118.745) ; v2(66.167,127.254) SW2.1 ; v2(88.011,127.381) SW3.1 ; v2(109.093,127.381) SW4.1 ; v2(130.175,127.381) SW5.1 ; v2(151.892,127.381) SW6.1
  Bottom Layer w0.254: v2(57.531,118.745) 57.658,118.745 v2(66.167,127.254) 87.884,127.254 v2(88.011,127.381) v2(109.093,127.381) v2(130.175,127.381) v2(151.892,127.381)
NetR1_2: R1.2 SW1.3 | length 18.3
  Top Layer w0.254: SW1.3 52.324,135.128 55.753,131.699 R1.2
NetR8_1: R8.1 R9.2 SB1.1 | length 10.8
  Top Layer w0.254: R9.2 R8.1 60.227,128.793 SB1.1
NetR10_1: R10.1 R11.2 SB2.1 | length 10.2
  Top Layer w0.254: R11.2 82.804,120.682 R10.1 82.946,128.92 SB2.1
NetR12_1: R12.1 R13.2 SB3.1 | length 10.4
  Top Layer w0.254: R13.2 103.251,120.84 R12.1 105.268,128.905 SB3.1
NetR14_1: R14.1 R15.2 SB4.1 | length 11.2
  Top Layer w0.254: R15.2 124.206,120.682 R14.1 124.295,129.032 SB4.1 ; 126.172,128.573 126.596,128.573
NetR16_1: R16.1 R17.2 SB5.1 | length 11.3
  Top Layer w0.254: R17.2 145.415,120.777 R16.1 145.584,128.685 147.635,128.685 147.882,128.685 148.033,128.685 ; 147.635,128.431 148.033,128.431
pads on no net: J1.S1 J1.S2 J2.3 J2.4 J3.3 J3.4 J4.3 J4.4 J5.3 J5.4 J6.3 J6.4 SW1.2 SW1.4 SW1.6 SW2.2 SW2.4 SW2.6 SW3.2 SW3.4 SW3.6 SW4.2 SW4.4 SW4.6 SW5.2 SW5.4 SW5.6 SW6.2 SW6.4 SW6.6
copper on no net: | length 0.5
  Top Layer w0.254: 68.961,0 69.469,0

## Polygon pours and split planes (outlines as drawn)
GND on Top Layer "GND_Top" (solid, pour order 12): 29.083,148.209 166.243,148.209 166.497,147.955 166.497,35.814 29.972,35.814 29.083,34.925
GND on Bottom Layer "GND_Bottom" (solid, pour order 14): 28.956,147.828 29.21,148.082 166.624,148.082 166.624,35.433 166.116,34.925 28.702,34.925

## Other copper
Top Layer:
  pour cut-out: 29.464,75.565 166.497,75.565 166.497,35.401 29.464,35.401
Bottom Layer:
  pour cut-out: 29.591,75.819 166.624,75.819 166.624,35.179 29.591,35.179

## Silkscreen, mask and mechanical layers (free items; w line width, h text height)
Top Overlay:
  drawing of 20 lines, arcs and shapes, not listed
  text "bee" at 145.428,142.801 h2
Mechanical 1:
  region: 156.464,68.453 94.234,68.453 94.234,45.339 156.464,45.339
  region: 64.77,38.735 64.77,54.991 42.672,54.991 42.672,38.735
  region: 64.77,57.912 64.77,74.168 42.672,74.168 42.672,57.912
  region: 89.408,38.989 89.408,55.245 67.31,55.245 67.31,38.989
  region: 89.662,57.531 89.662,73.787 67.564,73.787 67.564,57.531
  region: 221.107,72.263 204.851,72.263 204.851,50.165 221.107,50.165
  lines w0.254: 29.337,152.019 29.337,152.527 ; 30.861,151.764 29.337,152.273 ; 30.861,152.78 29.337,152.273 ; 89.195,152.218 29.337,152.273 ; 106.512,152.201 166.37,152.146 ; 164.846,151.639 166.37,152.146 ; 164.846,152.655 166.37,152.146 ; 166.37,151.892 166.37,152.4 ; 171.45,36.83 171.958,35.306 ; 171.45,146.685 171.958,148.209 ; 171.704,35.306 172.212,35.306 ; 171.704,148.209 172.212,148.209 ; 171.958,83.226 171.958,35.306 ; 171.958,100.289 171.958,148.209 ; 172.466,36.83 171.958,35.306 ; 172.466,146.685 171.958,148.209
  text "137.033 (mm)" at 89.448,151.303 h1.52 r359.95
  text "112.903 (mm)" at 172.872,83.48 h1.52 r90

## Text inside footprints (layer, text, board x,y; h text height)
Q1: Mechanical 13 "*" at 66.87,109.347 h1.27 r180
Q2: Mechanical 13 "*" at 89.786,109.347 h1.27 r180
Q3: Mechanical 13 "*" at 112.067,109.347 h1.27 r180
Q4: Mechanical 13 "*" at 133.46,109.347 h1.27 r180
Q5: Mechanical 13 "*" at 154.471,109.347 h1.27 r180